# Altium PCB HMC5883L 三轴磁场传感器电路图 显示元件名.PcbDoc
Units mm, origin at the board's own origin, x right, y up, seen from the top; angles counter-clockwise.
Board outline 15.24 x 13.33 mm, 2 copper layers (Top Layer, Bottom Layer); 14 components, 11 nets, 52 pads, 13 vias.
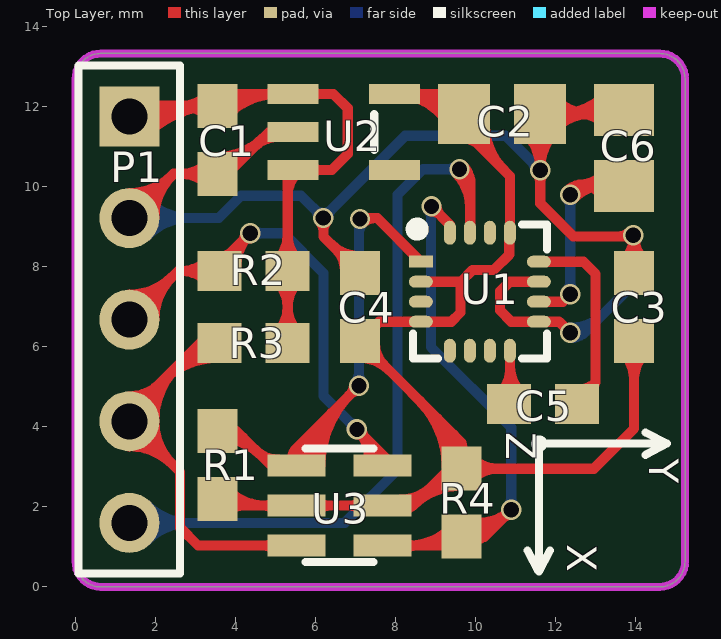
[diagram p0: Top Layer view]
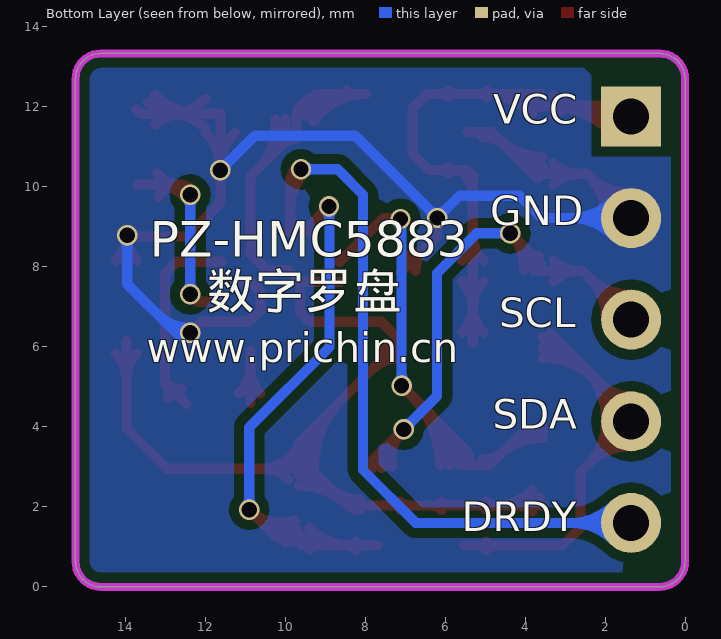
[diagram p1: Bottom Layer view, seen from below]

## Layer stack, top to bottom
Top Layer: signal copper 0.0356
Dielectric: dielectric 0.32, FR-4, Dk 4.8
Bottom Layer: signal copper 0.0356

## Board outline
0.635,0 cw(c0.635,0.635) 0,0.635 0,12.7 cw(c0.635,12.7) 0.635,13.335 14.605,13.335 cw(c14.605,12.7) 15.24,12.7 15.24,0.635 cw(c14.605,0.635) 14.605,0

## Design rules (kind name [scope] priority, off if disabled: settings)
Clearance [All] p1: gap=0.127
ComponentClearance [All] p1: gap=0 collisioncheckmode=3 verticalgap=0.254 showdistances=FALSE
HoleToHoleClearance [All] p1: gap=0.025 allowstackedmicrovias=TRUE
MinimumSolderMaskSliver [All] p1: minsoldermaskwidth=0.025
PolygonConnect [All] p1: connectstyle=Direct reliefconductorwidth=0.254 reliefentries=4 polygonreliefangle="90 Angle"
RoutingVias [All] p1: holewidth=0.254 width=0.381 viastyle="Through Hole" minholewidth=0.127 minwidth=0.127 maxholewidth=0.381 maxwidth=0.508
SilkToSilkClearance [All] p1: silktosilkclearance=0.025
SilkscreenOverComponentPads [All] p1: minsilkscreentomaskgap=0.025
SolderMaskExpansion [All] p1: expansion=0.051
TestPointUsage [All] p1: valid=0 allowmultiple=FALSE
Testpoint [All] p1: side=15 testpointundercomponent=TRUE minsize=1.016 maxsize=2.54 preferedsize=1.524 minholesize=0 maxholesize=1.016 preferedholesize=0.813 testpointgrid=0.025 style=1023 order=0123456789
Width [All] p1: maxlimit=0.254 minlimit=0.127 preferedwidth=0.254
19 further rules are at their usual default settings.

## Components (designator, comment, footprint, x,y, rotation, side; value= is the part's Value field where it differs from the comment)
C1 "Cap" 1608[0603] 3.556,11.176 r90 top
C2 "Cap" 6-0805 10.668,11.826 r180 top
C3 "Cap" 1608[0603] 13.966,6.996 r90 top
C4 "Cap" 1608[0603] 7.112,6.996 r90 top
C5 "Cap" 1608[0603] 11.684,4.572 r0 top
C6 "Cap" 6-0805 13.716,10.976 r90 top
P1 "Header 5" HDR1X5 1.346,11.76 r270 top
R1 "Res2" 1608[0603] 3.556,3.048 r90 top
R2 "Res2" 1608[0603] 4.456,7.896 r0 top
R3 "Res2" 1608[0603] 4.456,6.096 r180 top
R4 "Res2" 1608[0603] 9.652,2.104 r90 top
U1 "HMC5883L" LCC16 8.636,8.128 r0 top
U2 "RT9193-33" SOT-23-5 5.439,12.322 r0 top
U3 "K72XS" TSOP-6 6.604,2.032 r270 top

## Footprints (in the part's own frame and the unit in brackets; to place one, negate y for a bottom-side part, rotate by r counter-clockwise, add the part's x,y. Pads: shape width x height; smd on the part's side, far side on the other; paste and mask are expansions set on the pad)
6-0805 [mm] "Chip Resistor; Body 2.0 x 1.3 mm (LxW typ)"
  rect 1.3x1.5 smd: 1(-0.95,0) 2(0.95,0)
1608[0603] [mm] "Chip Capacitor; Body 1.6 x 0.8 mm (LxW typ)"
  rect 1.1x1 smd: 1(-0.85,0) 2(0.85,0)
HDR1X5 [mm] "Connector; Header; 5 Position"
  rect 1.5x1.5 hole 0.9: 1(0,0)
  round 1.5 hole 0.9: 2(2.54,0) 3(5.08,0) 4(7.62,0) 5(10.16,0)
  silkscreen extent -1.27,-1.27 11.43,1.27
LCC16 [mm]
  rect 0.6x0.3 smd: 1(0,0)
  oval 0.6x0.3 smd: 2(0,-0.5) 3(0,-1) 4(0,-1.5) 9(2.95,-1.5) 10(2.95,-1) 11(2.95,-0.5) 12(2.95,0)
  oval 0.3x0.6 smd: 5(0.725,-2.225) 6(1.225,-2.225) 7(1.725,-2.225) 8(2.225,-2.225) 13(2.225,0.725) 14(1.725,0.725) 15(1.225,0.725) 16(0.725,0.725)
  silkscreen extent -0.23,-2.42 3.15,0.95
SOT-23-5 [mil]
  rect 50x20 smd: 1(0,0) 2(0,-37.4) 3(0,-74.8) 4(100,-74.8) 5(100,0)
  silkscreen extent 80,-55 80,-20
TSOP-6 [mm] "SOT-457/SC-74; 6 Leads; Body 3.1 x 2.9 mm, inc. leads (LxW max)"
  rect 0.55x1.45 smd: 1(-1,-1.075) 2(0,-1.075) 3(1,-1.075) 4(1,1.075) 5(0,1.075) 6(-1,1.075)
  silkscreen extent -1.42,-0.85 1.41,0.85

## Part data
C1 C2 C3 C4 C5 C6: "Capacitor"
P1: "Header, 5-Pin"
R1 R2 R3 R4: "Resistor"
U2: "3.3V超低压差LDO"

## Via types
v1: diameter 0.508, hole 0.381, Top Layer to Bottom Layer, 13 vias

## Nets (pads, with @x,y where several pads share a name; then routed paths per layer and width w, separated by ;. In a path a pad name is that pad's centre, name@x,y a point inside that pad or via, vN(x,y) a via of type N, cw(c..) or ccw(c..) an arc to the next point about the centre after c; other vN are vias at no path point)
DRDY: P1.5 U1.15 | length 23.3
  Top Layer w0.254: v1@9.511,10.35 cw(c8.648,9.486) 9.869,9.486 ; v1(9.601,10.439) 9.869,10.172 9.869,8.861 U1.15 ; v1@9.691,10.529 cw(c9.261,10.099) 9.869,10.099
  Bottom Layer w0.254: P1.5 6.731,1.6 8.052,2.921 8.052,9.804 8.687,10.439 v1(9.601,10.439) ; P1.5@1.607,1.339 cw(c2.237,0.709) 2.237,1.6 cw(c2.237,2.491) P1.5@1.607,1.861 ; P1.5@1.787,1.16 cw(c2.85,0.096) 2.85,1.6 cw(c2.85,3.104) P1.5@1.787,2.041 ; v1@9.511,10.35 ccw(c9.295,10.133) 9.295,10.439 ccw(c9.295,10.746) v1@9.511,10.529
GND: C1.1 C2.1 C3.2 C4.2 C6.2 P1.2 U1.9 U1.11 U2.2 | length 60.6
  Top Layer w0.254: P1.2 2.452,10.326 C1.1 ; P1.2@1.346,9.589 ccw(c1.346,10.48) 1.976,9.85 ccw(c2.606,9.22) P1.2@1.715,9.22 ; P1.2@1.346,9.843 ccw(c1.346,11.347) 2.41,10.284 ccw(c3.473,9.22) P1.2@1.969,9.22 ; C1.1@3.292,10.062 ccw(c2.656,9.426) 2.656,10.326 ccw(c2.656,11.227) C1.1@3.292,10.59 ; C1.1@3.556,10.495 ccw(c3.556,11.488) 4.258,10.786 ; C1.1@3.556,10.749 ccw(c3.556,12.355) 4.692,11.219 ; C1.1@3.677,10.205 4.844,11.372 U2.2 ; 4.476,11.004 cw(c5.058,10.422) U2.2@5.058,11.245 ; v1@6.108,9.13 cw(c5.891,8.914) 6.198,8.914 cw(c6.504,8.914) v1@6.287,9.13 ; v1(6.198,9.22) 6.198,8.76 C4.2 ; 6.39,8.568 ccw(c7.112,9.29) C4.2@7.112,8.269 ; 6.511,8.447 cw(c5.959,7.896) C4.2@6.739,7.896 ; C2.1@11.248,11.356 cw(c10.355,10.463) 11.618,10.463 cw(c12.881,10.463) C2.1@11.988,11.356 ; v1@11.528,10.324 cw(c11.311,10.107) 11.618,10.107 cw(c11.925,10.107) v1@11.708,10.324 ; v1@11.528,10.504 ccw(c11.311,10.721) 11.618,10.721 ccw(c11.925,10.721) v1@11.708,10.504 ; U1.11 10.854,7.628 10.617,7.391 10.617,6.909 10.897,6.629 11.585,6.629 U1.9 12.092,6.628 v1(12.37,6.35) ; C2.1@11.988,11.456 cw(c12.881,10.563) 12.881,11.826 cw(c12.881,13.089) C2.1@11.988,12.196 ; C2.1@12.112,11.826 ccw(c12.112,13.43) C6.2@13.246,12.296 ; 12.595,11.826 cw(c12.595,10.905) C6.2@13.246,11.556 ; 12.725,11.826 ccw(c12.725,12.817) C6.2@13.426,12.116 ; 13.577,8.763 ccw(c13.577,9.156) v1@13.855,8.878 ; C3.2@13.71,8.167 ccw(c13.145,8.763) v1@13.966,8.763 ; C6.2 13.616,11.826 C2.1 v1(11.618,10.414) 11.618,9.591 12.446,8.763 v1@13.945,8.763 ; v1@13.855,8.699 cw(c13.586,8.43) 13.966,8.43 ; C3.2 v1@13.966,8.763 ; 13.966,8.533 cw(c14.2,8.533) v1@14.034,8.699 ; C3.2@14.222,8.167 cw(c14.787,8.763) v1@13.966,8.763
  Bottom Layer w0.254: P1.2 3.581,9.22 4.14,9.779 5.639,9.779 6.193,9.224 8.247,11.278 10.754,11.278 v1(11.618,10.414) ; P1.2@1.607,8.959 cw(c2.237,8.329) 2.237,9.22 cw(c2.237,10.111) P1.2@1.607,9.481 ; P1.2@1.787,8.78 cw(c2.85,7.716) 2.85,9.22 cw(c2.85,10.724) P1.2@1.787,9.661 ; v1@6.071,9.22 ccw(c5.764,9.22) 5.981,9.437 ccw(c6.198,9.654) 6.198,9.347 ccw(c6.198,9.634) 6.4,9.431 ; v1@6.325,9.22 cw(c6.651,9.22) 6.42,9.451 ; v1@11.491,10.414 ccw(c11.184,10.414) 11.401,10.631 ccw(c11.618,10.848) v1@11.618,10.541 ; v1@12.294,6.35 12.725,6.35 13.945,7.569 v1(13.945,8.788) ; v1@12.37,6.223 ccw(c12.37,6.775) 12.76,6.385 ; v1@12.37,6.477 ccw(c12.37,7.642) 13.194,6.818 ; v1@12.46,6.26 cw(c12.676,6.043) 12.676,6.35 cw(c12.676,6.657) v1@12.46,6.44 ; v1@13.855,8.699 cw(c13.638,8.482) 13.945,8.482 cw(c14.251,8.482) v1@14.034,8.699
NetC5_1: C5.1 U1.8 | length 2.7
  Top Layer w0.254: C5.1@10.62,4.836 ccw(c10.039,5.417) 10.861,5.417 ; C5.1@10.861,4.599 U1.8 ; 10.861,5.528 ccw(c11.84,5.528) C5.1@11.148,4.836
NetC5_2: C5.2 U1.12 | length 5.9
  Top Layer w0.254: U1.12 12.7,8.128 13.005,7.823 13.005,5.105 ; C5.2@12.471,4.572 13.005,5.105 ; C5.2@12.597,4.945 ccw(c12.616,5.494) 13.005,5.105 ; C5.2@12.928,4.716 cw(c13.257,4.854) 13.005,5.105
NetC6_1: C6.1 U1.10 | length 8.2
  Top Layer w0.254: U1.10 12.183,7.128 ; v1@12.28,9.894 cw(c12.676,9.498) 12.676,10.058 ; v1(12.37,9.804) 12.624,10.058 ; v1@12.46,9.715 cw(c13.29,8.885) C6.1@13.29,10.058 ; C6.1@13.17,9.753 ccw(c12.624,9.418) 12.624,10.058 ; C6.1@13.2,10.343 cw(c12.624,10.784) 12.624,10.058 ; C6.1@13.684,10.058 12.624,10.058
  Bottom Layer w0.254: v1@12.28,7.405 ccw(c12.063,7.622) 12.37,7.622 ccw(c12.676,7.622) v1@12.46,7.405 ; v1@12.28,9.715 cw(c12.063,9.498) 12.37,9.498 cw(c12.676,9.498) v1@12.46,9.715 ; v1(12.37,7.315) v1(12.37,9.804)
SCL: R1.2 U1.1 U3.1 | length 21.2
  Top Layer w0.254: R1.2@3.556,3.729 cw(c3.556,2.184) 4.648,3.277 ; R1.2 4.027,3.898 4.893,3.032 U3.1 ; R1.2@3.556,3.983 cw(c3.556,3.052) 4.215,3.71 ; 4.508,3.416 ccw(c5.079,3.987) U3.1@5.079,3.18 ; U3.1@5.045,3.032 U3.1 ; U3.1@5.365,3.032 cw(c6.03,3.032) 5.56,3.502 ; U3.1@5.619,3.032 cw(c6.898,3.032) 5.993,3.936 ; U3.1@5.622,3.147 cw(c5.853,3.43) 5.488,3.43 ; U3.1@5.873,3.032 cw(c7.765,3.032) 6.427,4.37 ; U3.1@6.127,3.032 cw(c8.632,3.032) 6.861,4.803 ; v1@6.96,5.029 cw(c6.653,5.029) 6.87,4.812 cw(c7.087,4.596) v1@7.087,4.902 ; v1(7.087,5.029) 5.488,3.43 ; v1(7.112,9.195) 7.087,9.22 7.544,9.22 U1.1 ; v1@7.202,9.105 cw(c7.48,8.827) 7.48,9.22 ; 5.488,3.43 5.488,3.073 U3.1
  Bottom Layer w0.254: v1@6.997,5.119 ccw(c6.78,5.336) 7.087,5.336 ccw(c7.393,5.336) v1@7.176,5.119 ; v1(7.087,5.029) 7.087,9.22 v1(7.112,9.195) ; 7.087,8.827 cw(c7.48,8.827) v1@7.202,9.105
SCL_IN: P1.3 R2.1 U3.6 | length 22.5
  Top Layer w0.254: P1.3 2.562,7.896 R2.1 ; P1.3@1.346,7.049 ccw(c1.346,7.94) 1.976,7.31 ccw(c2.606,6.68) P1.3@1.715,6.68 ; P1.3@1.346,7.303 ccw(c1.346,8.807) 2.41,7.744 ccw(c3.473,6.68) P1.3@1.969,6.68 ; R2.1@3.292,7.632 ccw(c2.656,6.996) 2.656,7.896 ccw(c2.656,8.796) R2.1@3.292,8.16 ; R2.1@3.606,8.076 v1(4.369,8.839) ccw(c5.199,8.009) R2.1@4.028,7.923 ; R2.1@3.656,8.269 ccw(c3.656,8.613) R2.1@3.899,8.37 ; R2.1@3.775,7.905 cw(c4.468,7.955) 3.976,8.447 ; v1@4.242,8.839 cw(c3.935,8.839) 4.152,8.622 cw(c4.369,8.406) v1@4.369,8.712 ; v1@7.033,3.94 cw(c6.275,3.182) U3.6@7.334,3.016 ; v1@7.036,3.81 cw(c7.036,3.503) 7.253,3.72 cw(c7.469,3.937) v1@7.163,3.937 ; v1(7.036,3.937) U3.6@7.836,3.137 ; 7.386,3.587 cw(c6.885,3.086) U3.6@7.585,2.976 ; U3.6@7.739,3.234 cw(c7.495,2.99) U3.6@7.836,2.937
  Bottom Layer w0.254: v1(4.369,8.839) 5.207,8.839 6.198,7.849 6.198,4.775 v1(7.036,3.937) ; v1@4.459,8.749 cw(c4.675,8.533) 4.675,8.839 cw(c4.675,9.146) v1@4.459,8.929 ; v1@6.909,3.937 ccw(c6.602,3.937) 6.819,4.154 ccw(c7.036,4.371) v1@7.036,4.064
SDA: R4.1 U1.16 U3.4 | length 20.8
  Top Layer w0.254: U3.4 R4.1@9.576,1.032 ; U3.4@8.234,0.927 cw(c8.486,0.675) 8.486,1.032 cw(c8.486,1.389) U3.4@8.234,1.137 ; U3.4@8.337,1.032 ccw(c8.337,2.518) R4.1@9.388,1.467 ; v1@8.903,9.385 cw(c8.903,9.079) 9.12,9.295 cw(c9.336,9.512) v1@9.03,9.512 ; v1@8.915,9.5 9.361,9.054 U1.16 ; 8.95,1.032 ccw(c8.95,1.905) R4.1@9.568,1.288 ; R4.1@9.166,1.032 cw(c9.166,0.717) R4.1@9.388,0.94 ; R4.1@9.61,1.175 ccw(c9.823,1.831) 10.31,1.343 ; R4.1 10.22,1.254 ; R4.1@9.689,1.417 ccw(c9.966,2.274) 10.603,1.637 ; R4.1@9.767,1.658 ccw(c10.11,2.717) v1(10.897,1.93) 10.22,1.254 ; R4.1@9.994,1.105 cw(c10.22,1.008) 10.22,1.254 ; R4.1@9.994,1.402 ccw(c10.22,1.499) 10.22,1.254 ; v1@10.77,1.93 cw(c10.463,1.93) 10.68,1.714 cw(c10.897,1.497) v1@10.897,1.803
  Bottom Layer w0.254: v1@8.813,9.422 cw(c8.627,9.236) 8.89,9.236 ; 8.89,9.175 cw(c9.24,9.175) v1@8.993,9.422 ; v1@8.89,9.5 8.89,5.994 10.897,3.988 v1(10.897,1.93) ; v1@10.807,2.02 ccw(c10.59,2.237) 10.897,2.237 ccw(c11.203,2.237) v1@10.986,2.02
  other v1: 8.903,9.512
SDA_IN: P1.4 R3.2 U3.3 | length 20
  Top Layer w0.254: P1.4@1.346,3.517 cw(c1.346,2.013) 2.41,3.077 cw(c3.473,4.14) 1.969,4.14 cw(c3.902,4.14) 2.535,5.507 ; P1.4@1.346,3.771 cw(c1.346,2.88) 1.976,3.51 cw(c2.606,4.14) 1.715,4.14 cw(c3.035,4.14) 2.102,5.074 ; P1.4 2.616,2.87 2.616,1.48 3.064,1.032 U3.3 ; P1.4@1.346,4.318 R3.2@3.378,6.35 ; P1.4@1.346,4.763 ccw(c1.346,5.838) 2.106,5.078 ; 2.182,5.154 cw(c3.556,3.78) R3.2@3.556,5.723 ; 2.616,5.588 cw(c3.556,4.647) R3.2@3.556,5.977 ; 3.049,6.021 cw(c3.556,5.514) R3.2@3.556,6.231 ; U3.3@4.974,0.927 ccw(c4.722,0.675) 4.722,1.032 ccw(c4.722,1.389) U3.3@4.974,1.137
VCC3V: C2.2 C3.1 C4.1 R1.1 R4.2 U1.2 U1.4 U1.13 U2.5 U3.2 U3.5 | length 53
  Top Layer w0.254: R1.1@3.531,2.032 U3.2 U3.5 8.433,2.032 ; R1.1@3.64,2.232 ccw(c4.123,2.715) 4.123,2.032 ; R1.1@3.82,1.884 cw(c4.176,1.528) 4.176,2.032 ; R1.1@3.82,2.412 ccw(c4.737,3.329) 4.737,2.032 ; U3.2@4.974,1.927 ccw(c4.722,1.675) 4.722,2.032 ccw(c4.722,2.389) U3.2@4.974,2.137 ; U3.2@6.084,1.927 cw(c6.336,1.675) 6.336,2.032 cw(c6.336,2.389) U3.2@6.084,2.137 ; C4.1@7.112,5.723 cw(c7.112,4.702) 7.834,5.424 ; U3.5@7.124,1.927 ccw(c6.872,1.675) 6.872,2.032 ccw(c6.872,2.389) U3.5@7.124,2.137 ; C4.1@7.485,6.096 ccw(c8.265,6.096) 7.713,5.545 ; U3.5@8.129,1.926 ccw(c8.129,2.404) 8.467,2.066 ; U3.5@8.129,2.18 ccw(c8.129,3.271) 8.9,2.499 ; U3.5@8.246,1.941 cw(c8.433,1.794) 8.433,2.032 ; U3.5@8.246,2.123 ccw(c8.433,2.27) 8.433,2.032 ; 8.422,2.021 cw(c9.652,0.791) R4.2@9.652,2.531 ; U2.5@8.45,12.232 cw(c8.667,12.015) 8.667,12.322 cw(c8.667,12.629) U2.5@8.45,12.412 ; U2.5@8.46,12.322 cw(c8.46,11.068) C2.2@9.496,11.774 ; 8.589,4.669 cw(c6.924,3.004) R4.2@9.279,3.004 ; U1.2 9.619,7.628 9.627,7.62 ; 8.855,2.455 cw(c9.652,1.658) R4.2@9.652,2.785 ; 8.94,12.322 cw(c8.94,11.396) C2.2@9.706,11.918 ; 9.023,4.235 cw(c7.791,3.004) R4.2@9.533,3.004 ; C2.2@9.286,11.631 ccw(c7.979,10.74) U2.5 9.222,12.322 C2.2 9.718,11.415 10.861,10.272 U1.13 10.846,8.838 10.846,8.306 10.465,7.925 9.931,7.925 9.627,7.62 ; 9.457,3.802 cw(c8.659,3.004) R4.2@9.787,3.004 ; R4.2@9.486,3.338 ccw(c9.352,3.606) 9.652,3.606 ; R4.2 12.961,2.954 13.966,3.958 C3.1 ; C2.2@9.718,11.203 cw(c9.718,10.692) 10.08,11.053 ; R4.2@9.818,3.338 cw(c9.952,3.606) 9.652,3.606 ; R4.2@9.916,2.69 cw(c10.552,2.053) 10.552,2.954 cw(c10.552,3.854) R4.2@9.916,3.217 ; C2.2@9.986,11.705 ccw(c11.116,11.619) 10.315,10.818 ; C2.2@10.239,11.686 ccw(c11.841,11.563) 10.705,10.427 ; C3.1@13.702,5.832 cw(c13.066,5.196) 13.966,5.196 cw(c14.866,5.196) C3.1@14.23,5.832 ; 8.433,2.032 9.652,3.251 9.652,3.606 ; 9.627,7.62 9.627,6.858 9.397,6.628 U1.4 7.594,6.628 C4.1 9.652,3.606
VCC5V: C1.2 P1.1 R2.2 R3.1 U2.1 U2.3 | length 27.2
  Top Layer w0.254: P1.1@1.372,12.026 C1.2 ; P1.1@1.428,11.679 cw(c2.266,10.841) 2.266,12.026 ; P1.1@1.607,11.499 cw(c2.879,10.228) 2.879,12.026 ; P1.1@1.787,11.32 cw(c3.492,9.614) C1.2@3.492,12.026 ; P1.1@1.787,12.201 ccw(c2.209,12.623) 2.209,12.026 ; C1.2@3.292,11.762 ccw(c2.656,11.126) 2.656,12.026 ccw(c2.656,12.926) C1.2@3.292,12.29 ; C1.2@3.607,12.322 U2.1 6.449,12.322 6.807,11.963 6.807,10.82 6.409,10.422 U2.3 5.306,10.289 R2.2 R3.1 ; C1.2@3.64,11.992 cw(c4.437,11.195) 4.437,12.322 ; C1.2@3.82,11.812 cw(c5.05,10.582) U2.1@5.05,12.322 ; U2.1@4.968,12.232 ccw(c4.751,12.015) 4.751,12.322 ccw(c4.751,12.629) U2.1@4.968,12.412 ; R3.1@5.042,6.36 ccw(c4.406,6.996) 5.306,6.996 ccw(c6.206,6.996) R3.1@5.57,6.36 ; R2.2@5.042,7.632 cw(c4.406,6.996) 5.306,6.996 cw(c6.206,6.996) R2.2@5.57,7.632 ; R2.2@5.042,8.16 ccw(c4.406,8.796) 5.306,8.796 ccw(c6.206,8.796) R2.2@5.57,8.16 ; 5.306,9.794 cw(c6.067,9.794) U2.3@5.529,10.332 ; U2.3@5.91,10.332 cw(c6.127,10.115) 6.127,10.422 cw(c6.127,10.729) U2.3@5.91,10.512 ; U2.1@5.91,12.232 cw(c6.127,12.015) 6.127,12.322 cw(c6.127,12.629) U2.1@5.91,12.412
pads on no net: U1.3 U1.5 U1.6 U1.7 U1.14 U2.4

## Polygon pours and split planes (outlines as drawn)
GND on Bottom Layer "Keep-Out Layer-No Net" (solid, remove dead copper, pour order 1000): 0,0 15.24,0 15.24,1.346 15.24,13.335 0,13.335

## Keep-outs
Keep-Out Layer:
  the board outline again, w0.2

## Silkscreen, mask and mechanical layers (free items; w line width, h text height)
Top Overlay:
  circle w0.2: c11.595,3.581 r0.102
  lines w0.2: 11.303,0.914 11.582,0.381 ; 11.862,0.914 11.582,0.381 ; 14.249,3.302 14.783,3.581 ; 14.249,3.861 14.783,3.581 ; 11.582,0.381 11.582,3.581 14.783,3.581
  text "Z" at 10.516,3.861 h1.27 r270
  text "Y" at 14.097,3.2 h1.27 r270
  text "X" at 12.04,1.067 h1.27 r270
Bottom Overlay:
  text "VCC" at 4.792,11.328 h1.27
  text "GND" at 4.864,8.788 h1.27
  text "PZ-HMC5883" at 13.386,7.95 h1.52
  text "数字罗盘" at 11.97,6.668 h1.52
  text "SCL" at 4.65,6.245 h1.27
  text "www.prichin.cn" at 13.458,5.359 h1.27
  text "SDA" at 4.807,3.703 h1.27
  text "DRDY" at 5.588,1.143 h1.27